# Altium PCB ESC.PcbDoc
Units mm, origin at the board's own origin, x right, y up, seen from the top; angles counter-clockwise.
Board outline 39.75 x 27.3 mm, 4 copper layers (Top Layer, Internal Plane 1, Internal Plane 2, Bottom Layer), stack 1.596 mm thick; 84 components, 56 nets, 277 pads, 49 vias.
Unrouted connection lines stored in the file: 121.
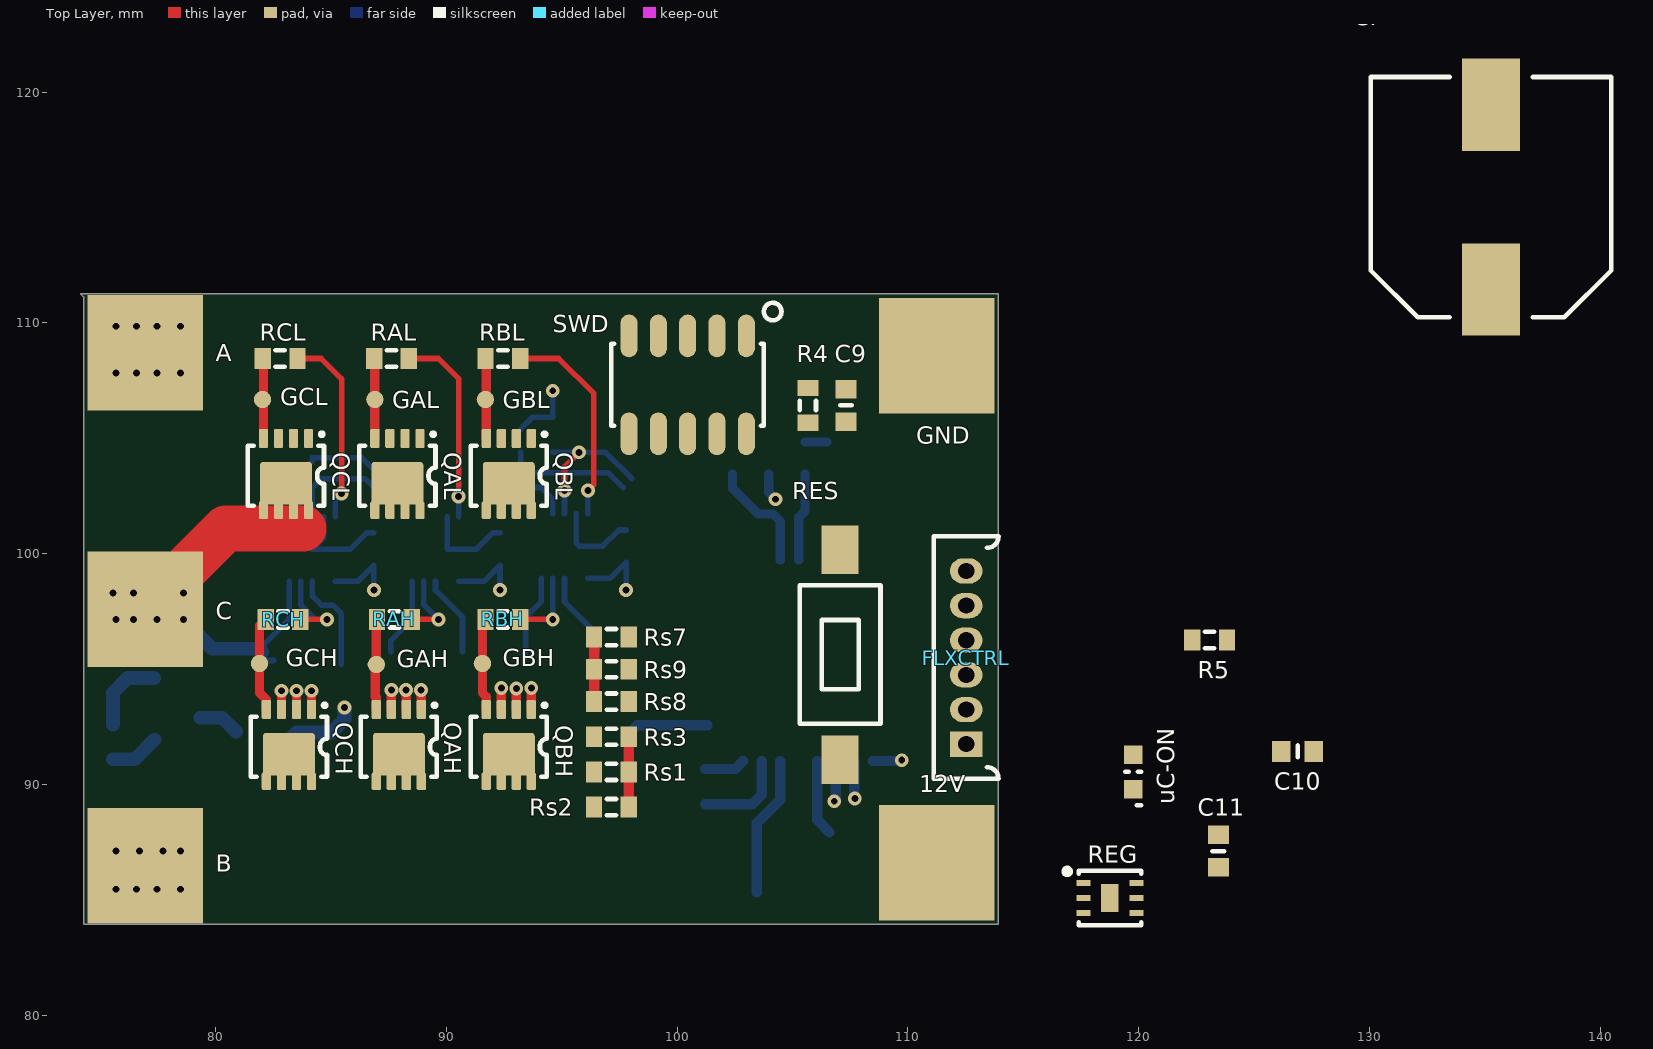
[diagram p0: Top Layer view]
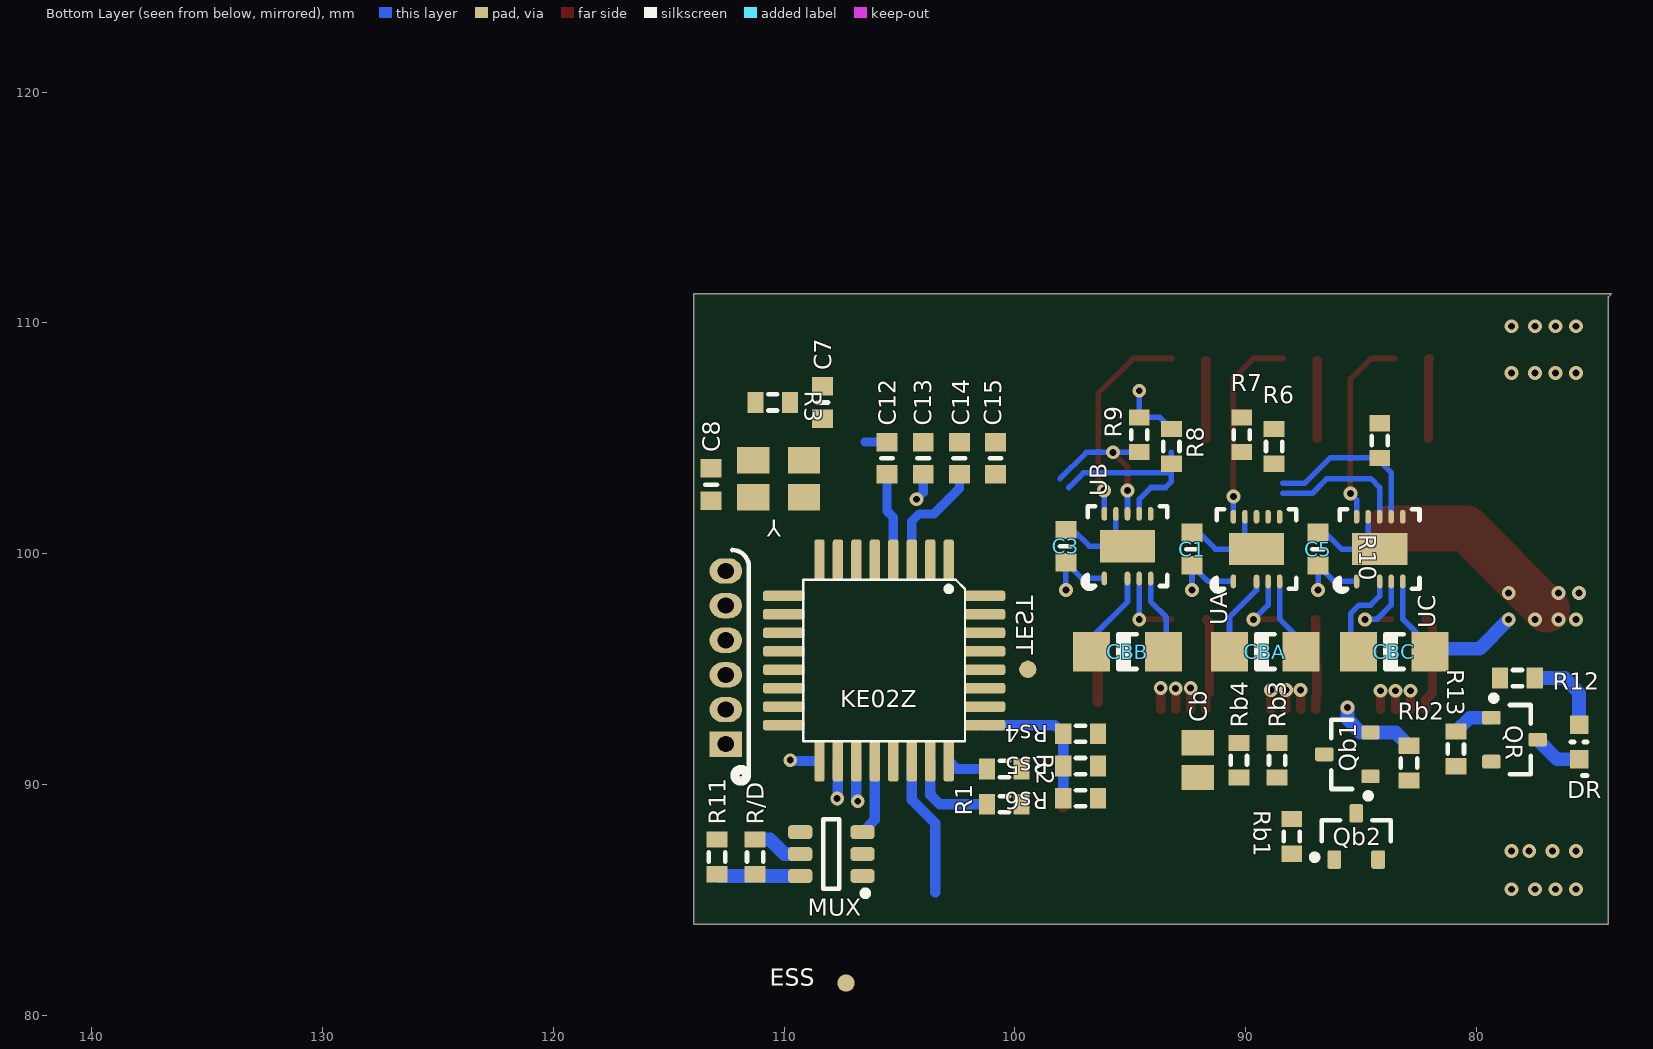
[diagram p1: Bottom Layer view, seen from below]
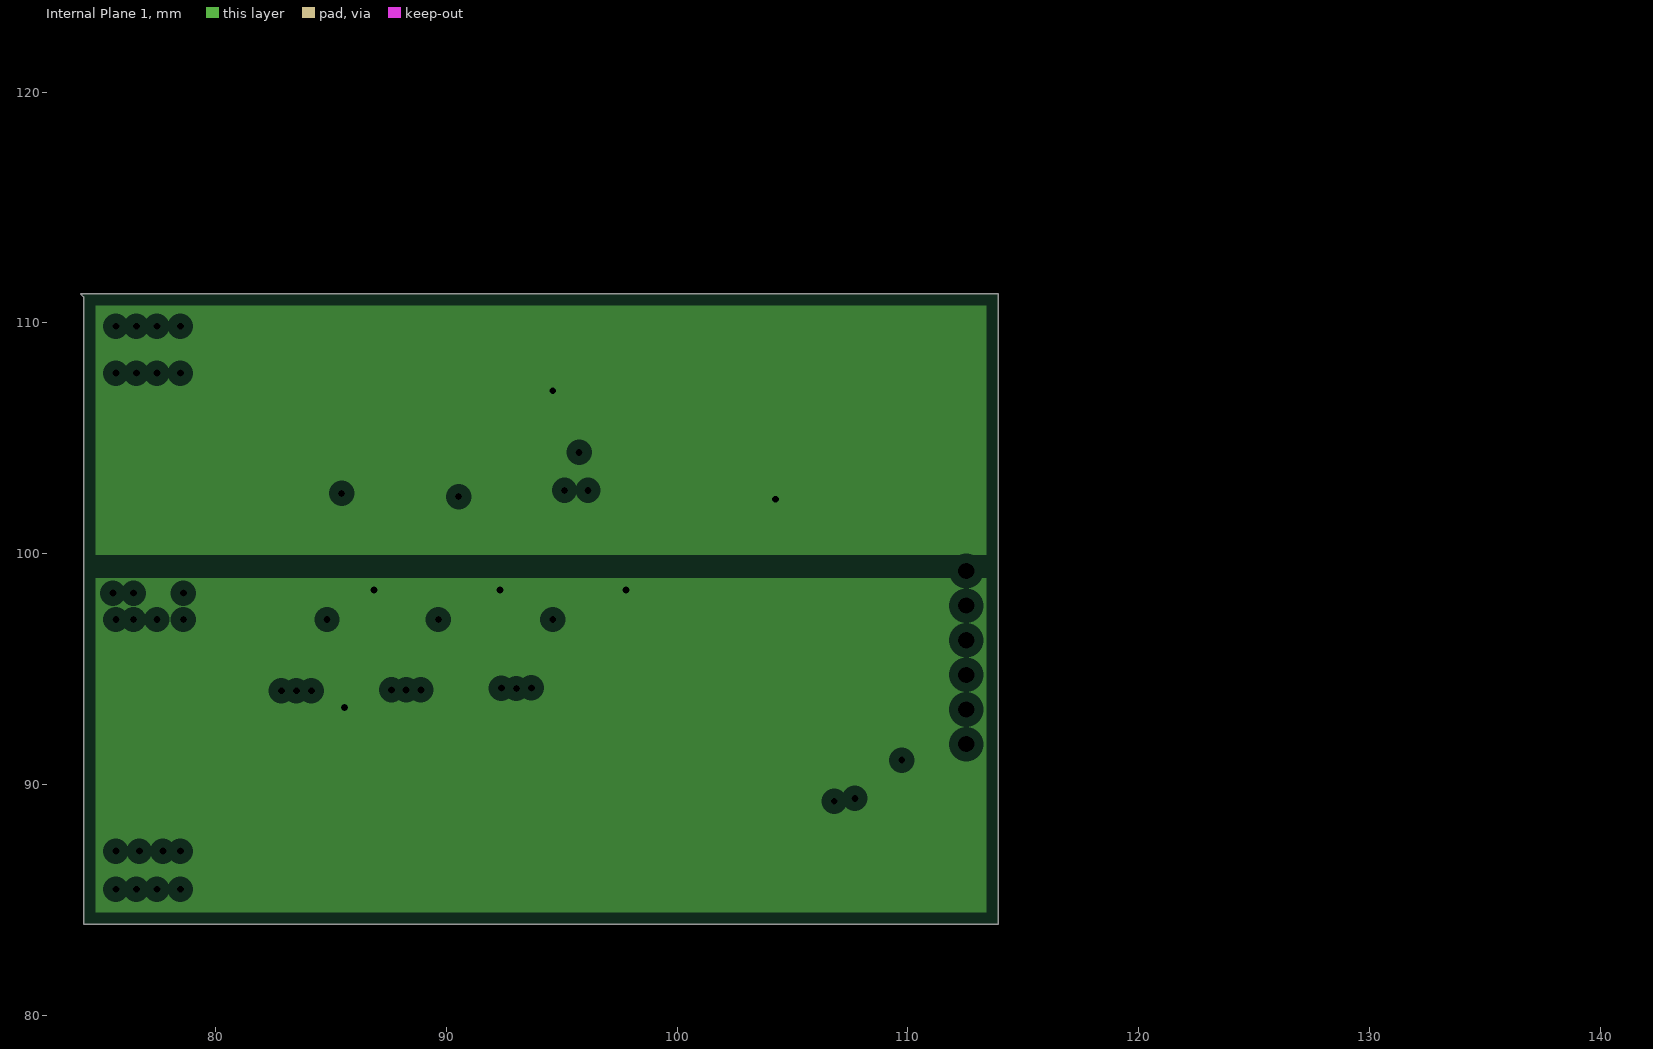
[diagram p2: Internal Plane 1, clearances drawn from the general rule]
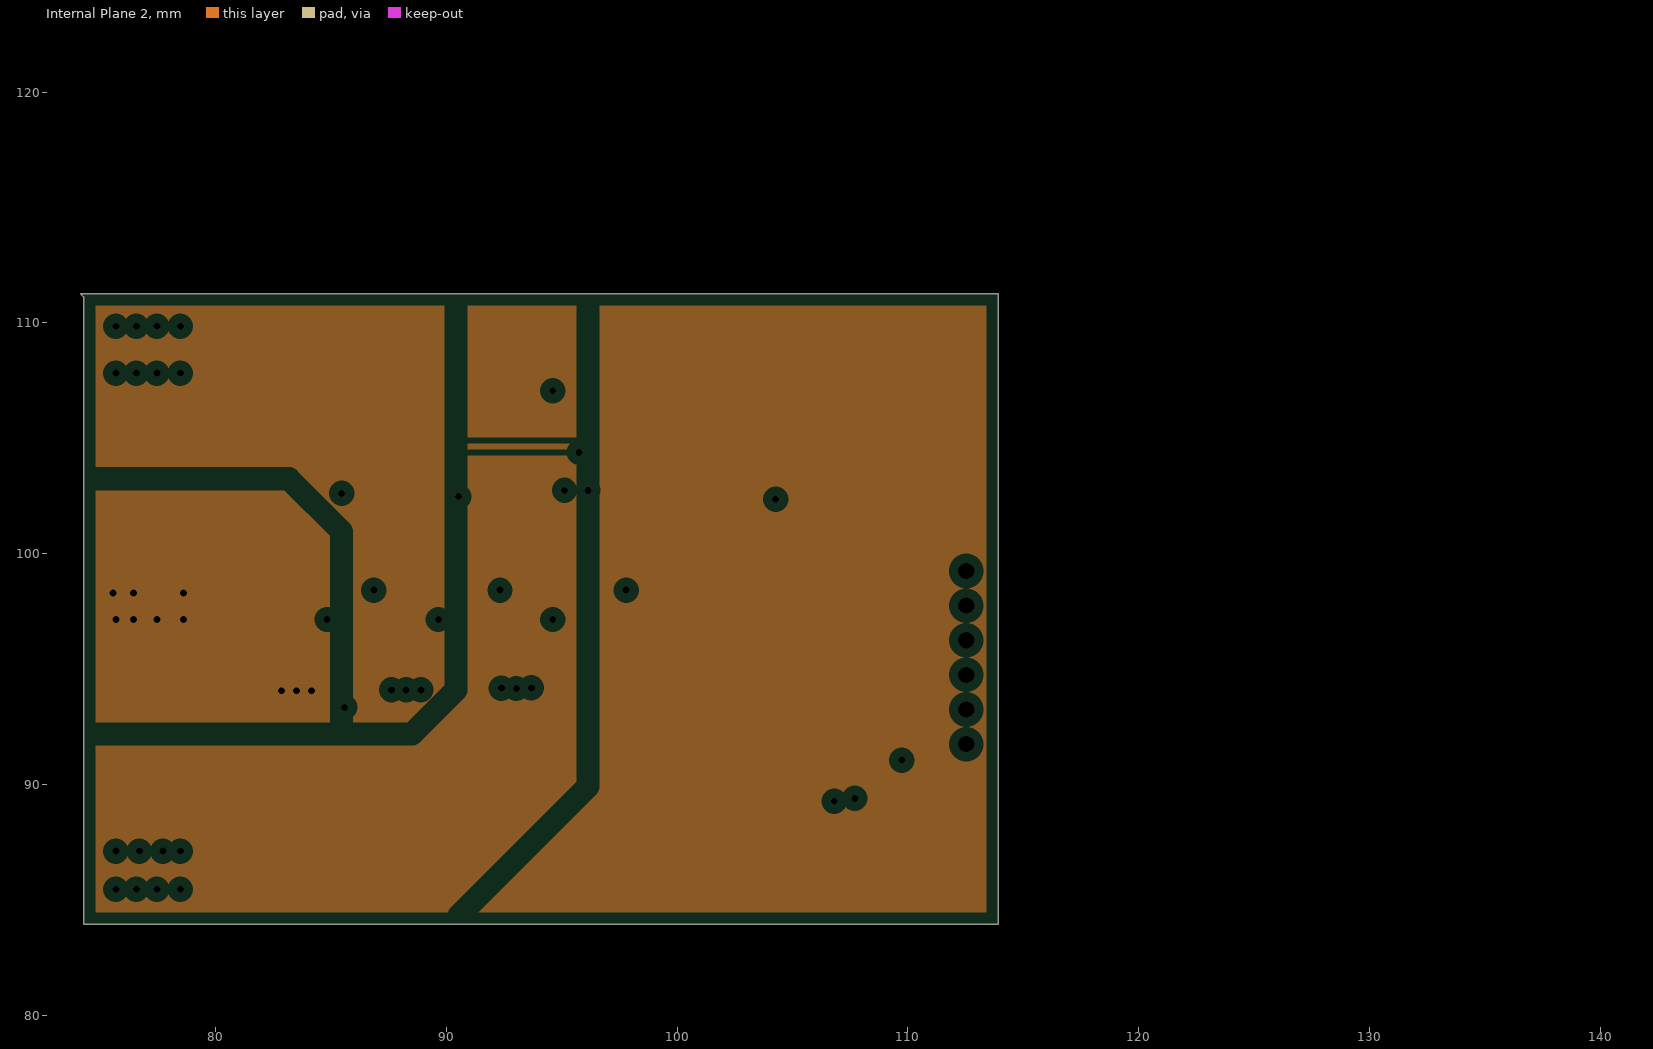
[diagram p3: Internal Plane 2, clearances drawn from the general rule]

## Layer stack, top to bottom
Top Layer: signal copper 0.0356
Dielectric: prepreg 0.127, FR-4, Dk 4.8
Internal Plane 1: plane copper 0.0356, net (Multiple Nets)
Dielectric: core 1.2, FR-4, Dk 4.8
Internal Plane 2: plane copper 0.0356, net (Multiple Nets)
Dielectric: prepreg 0.127, FR-4, Dk 4.8
Bottom Layer: signal copper 0.0356

## Board outline
74.168,111.252 74.295,111.125 74.295,83.947 113.919,83.947 113.919,111.252

## Design rules (kind name [scope] priority, off if disabled: settings)
AcuteAngle AcuteAngle_small [IsWire and (Width  <= 0.2)] p1: minimum=9.00000000000000E+0001 checktracksonly=FALSE
AcuteAngle [not (IsWire and (Width  <= 0.2))] p2: minimum=6.00000000000000E+0001 checktracksonly=FALSE
AssemblyTestPointUsage [All] p1: allowmultiple=TRUE
Clearance Clearance_Poly [All vs inpolygon] p1: gap=0.3
Clearance [All] p2: gap=0.2
ComponentClearance [All] p1: gap=0.25 collisioncheckmode=3 verticalgap=1 showdistances=FALSE
ComponentOrientations [All] p1: allowedrotations=32
FabricationTestPointUsage [All] p1: valid=0 allowmultiple=TRUE
Height [All] p1: minheight=0 maxheight=20 prefheight=10
HoleSize [Not (IsPad and not PadIsPlated)] p1: absolutevalues=TRUE maxlimit=5 minlimit=0.2 maxpercent=80.000 minpercent=20.000
HoleToHoleClearance [All] p1: gap=0.2 allowstackedmicrovias=TRUE
MinimumAnnularRing [All] p1: minimumring=0.1
MinimumSolderMaskSliver [All] p1: minsoldermaskwidth=0.075
NetsToIgnore [InNet('GND')] p1:
PermittedLayers [All] p1: toplayerpermitted=TRUE bottomlayerpermitted=TRUE
PlaneClearance [All] p1: clearance=0.4
PlaneConnect PlaneConnect_Direct [isvia and not TouchesRoom('Via_on_pad1')] p1: planeconnectstyle=Direct reliefexpansion=0.508 reliefentries=4 reliefconductorwidth=0.254 reliefairgap=0.254
PlaneConnect [All] p2: planeconnectstyle=Relief reliefexpansion=0.25 reliefentries=4 reliefconductorwidth=0.25 reliefairgap=0.25
PolygonConnect PolygonConnect_Direct [isvia vs ispolygon] p1: connectstyle=Direct reliefconductorwidth=0.254 reliefentries=4 polygonreliefangle="90 Angle" airgapwidth=0.254
PolygonConnect [All] p2: connectstyle=Relief reliefconductorwidth=0.25 reliefentries=4 polygonreliefangle="90 Angle" airgapwidth=0.254
RoutingCorners [All] p1: cornerstyle=45-Degree minsetback=2.5 maxsetback=2.5
RoutingPriority [All] p1: routingpriority=5
RoutingPriority RoutingPriority_GND [InNet('GND')] p2: routingpriority=10
RoutingVias [All] p1: holewidth=0.3 width=0.6 viastyle="Through Hole" minholewidth=0.2 minwidth=0.4 maxholewidth=6 maxwidth=3
SMDNeckDown SMDNeckDown_tiny2 [ispad or Width <= 0.2] p1: percent=100.000
SMDNeckDown [All] p2: percent=50.000
SMDToCorner SMDToCorner_Exception [HasPad('U1-52') or HasPad('C9-1')] p1: distance=0
SMDToCorner [not (HasPad('U1-52') or HasPad('C9-1'))] p2: distance=59055
ShortCircuit ShortCircuit_NC [HasPad('U5-3') vs not IsElectrical] p1: allowed=TRUE
ShortCircuit [All] p2: allowed=FALSE
SilkToSilkClearance SilkToSilkOverlap [IsText and (StringText = 'Flying') vs IsText and (StringText = 'Automatons')] p1: silktosilkclearance=0
SilkToSilkClearance [All] p2: silktosilkclearance=0.05
SilkToSolderMaskClearance SilkscreenOverComponentPads [IsPad] p1: minsilkscreentomaskgap=0.1 clearancetoexposedcopper=TRUE
SolderMaskExpansion "Via Tenting" [IsVia] p1: expansion=-5
SolderMaskExpansion [All] p2: expansion=0.1
Width [All] p1: maxlimit=3 minlimit=0.2 preferedwidth=0.4
14 further rules are at their usual default settings.

## Classes and differential pairs
component class inverter: C1 C3 C5 CBA CBB CBC CI GAH GAL GBH GBL GCH GCL QAH QAL QBH QBL QCH QCL RAH RAL RBH RBL RCH RCL UA UB UC
component class connectors: 12V A B C ESS FLXCTRL GND SWD
component class microcontroller: C7 C8 C9 C10 C11 C12 C13 C14 C15 DR KE02Z QR R1 R2 R3 R4 R5 R6 R7 R8 R9 R10 R11 R12 R13 R/D REG RES TEST uC-ON Y
component class phase_sense: Cb MUX Qb1 Qb2 Rb1 Rb2 Rb3 Rb4 Rs1 Rs2 Rs3 Rs4 Rs5 Rs6 Rs7 Rs8 Rs9

## Components (designator, comment, footprint, x,y, rotation, side; value= is the part's Value field where it differs from the comment)
12V "5mm" SQUARE_PAD_5mm 111.252,86.614 r0 top
A "5mm" SQUARE_PAD_5mm 76.962,108.712 r90 top
B "5mm" SQUARE_PAD_5mm 76.962,86.487 r90 top
C "5mm" SQUARE_PAD_5mm 76.962,97.599 r90 top
C1 "1uF" CAPC1608L 92.329,100.203 r90 bottom
C3 "1uF" CAPC1608L 97.79,100.33 r90 bottom
C5 "1uF" CAPC1608L 86.868,100.203 r90 bottom
C7 "22pF" CAPC1608L 108.331,106.553 r270 bottom
C8 "22pF" CAPC1608L 113.157,102.997 r90 bottom
C9 "1uF" CAPC1608L 107.315,106.426 r270 top
C10 "1uF" CAPC1608L 126.873,91.44 r180 top
C11 "1uF" CAPC1608L 123.444,87.122 r270 top
C12 "1uF" CAPC1608L 105.537,104.14 r90 bottom
C13 "100nF" CAPC1608L 103.971,104.14 r270 bottom
C14 "1uF" CAPC1608L 102.404,104.14 r90 bottom
C15 "100nF" CAPC1608L 100.838,104.14 r270 bottom
Cb "330pF" CAPC2012L 92.075,91.059 r270 bottom
CBA "10uF" CAPC3216L 89.154,95.758 r180 bottom
CBB "10uF" CAPC3216L 95.123,95.758 r180 bottom
CBC "10uF" CAPC3216L 83.566,95.758 r180 bottom
CI "470uF" CAP_RADIAL-CAN_SMD_M10 135.255,115.443 r90 top
DR "LED-RED" DSO-F2/D3.4 75.565,91.848 r270 bottom
ESS "TESTPOINT-ARROW-BLUE" TESTP_PAD_.75mm#1 107.315,81.407 r270 bottom
FLXCTRL "HEADER-6x1" X-JST-S6B-ZR 112.522,95.504 r90 top
GAH "TESTPOINT-ARROW-BLUE" TESTP_PAD_.75mm#1 86.972,95.204 r90 top
GAL "TESTPOINT-ARROW-BLUE" TESTP_PAD_.75mm#1 86.909,106.68 r90 top
GBH "TESTPOINT-ARROW-BLUE" TESTP_PAD_.75mm#1 91.567,95.25 r90 top
GBL "TESTPOINT-ARROW-BLUE" TESTP_PAD_.75mm#1 91.694,106.68 r90 top
GCH "TESTPOINT-ARROW-BLUE" TESTP_PAD_.75mm#1 81.915,95.25 r90 top
GCL "TESTPOINT-ARROW-BLUE" TESTP_PAD_.75mm#1 82.042,106.68 r90 top
GND "5mm" SQUARE_PAD_5mm 111.252,108.585 r0 top
KE02Z "MKE02ZxxVLC2(R)" JEDEC_MS-026BBA 105.664,95.377 r0 bottom
MUX "TS5A3159A" JEDEC_MO-178AB 107.95,86.995 r0 bottom
QAH "ManufacturerPartNumber" x-NXP_LFPAK33 87.947,91.638 r270 top
QAL "ManufacturerPartNumber" x-NXP_LFPAK33 87.884,103.378 r270 top
Qb1 "BSS84" SOT23-3L 85.598,91.313 r0 bottom
Qb2 "BJT-NPN-BEC" SOT23-3L 85.217,87.757 r90 bottom
QBH "ManufacturerPartNumber" x-NXP_LFPAK33 92.71,91.638 r270 top
QBL "ManufacturerPartNumber" x-NXP_LFPAK33 92.71,103.378 r270 top
QCH "ManufacturerPartNumber" x-NXP_LFPAK33 83.185,91.638 r270 top
QCL "ManufacturerPartNumber" x-NXP_LFPAK33 83.058,103.378 r270 top
QR "BJT-NPN-BEC" SOT23-3L 78.359,91.948 r180 bottom
R1 "10K" RESC1608L 100.457,89.154 r0 bottom
R2 "10K" RESC1608L 100.457,90.678 r0 bottom
R3 "1M" RESC1608L 110.49,106.553 r180 bottom
R4 "10K" RESC1608L 105.664,106.426 r90 top
R5 "100" RESC1608L 123.063,96.266 r0 top
R6 "10K" RESC1608L 88.773,104.648 r90 bottom
R7 "10K" RESC1608L 90.17,105.156 r90 bottom
R8 "10K" RESC1608L 93.218,104.648 r90 bottom
R9 "10K" RESC1608L 94.615,105.156 r90 bottom
R10 "10K" RESC1608L 84.201,104.902 r90 bottom
R11 "10K" RESC1608L 112.903,86.868 r90 bottom
R12 "220" RESC1608L 78.232,94.615 r180 bottom
R13 "10K" RESC1608L 80.899,91.548 r270 bottom
R/D "0" RESC1608L 111.252,86.868 r270 bottom
RAH "6.8" RESC1608L 87.757,97.155 r0 top
RAL "6.8" RESC1608L 87.63,108.458 r0 top
Rb1 "10K" RESC1608L 88.011,87.757 r90 bottom
Rb2 "1M" RESC1608L 82.931,90.932 r270 bottom
Rb3 "2.2K" RESC1608L 88.646,91.059 r90 bottom
Rb4 "680" RESC1608L 90.297,91.059 r270 bottom
RBH "6.8" RESC1608L 92.456,97.155 r0 top
RBL "6.8" RESC1608L 92.456,108.458 r0 top
RCH "6.8" RESC1608L 82.931,97.155 r0 top
RCL "6.8" RESC1608L 82.804,108.458 r0 top
REG "LP5900" x-TI_S-NGF0006A 118.745,85.09 r0 top
RES "SWITCH_TACTILE_SPST-2T-NO" X-TECO_FSMSM 107.061,95.631 r270 top
Rs1 "43K" RESC1608L 97.155,90.551 r0 top
Rs2 "43K" RESC1608L 97.155,89.027 r180 top
Rs3 "10K" RESC1608L 97.155,92.075 r180 top
Rs4 "43K" RESC1608L 97.155,92.202 r0 bottom
Rs5 "43K" RESC1608L 97.155,90.805 r180 bottom
Rs6 "10K" RESC1608L 97.155,89.408 r180 bottom
Rs7 "43K" RESC1608L 97.155,96.393 r180 top
Rs8 "43K" RESC1608L 97.155,93.599 r0 top
Rs9 "10K" RESC1608L 97.155,94.996 r0 top
SWD "HEADER-5x2S" G-HEADER_5x2I.05P_SM 100.457,107.315 r270 top
TEST "TESTPOINT-ARROW-BLUE" TESTP_PAD_.75mm#2 99.441,94.996 r90 top
UA "UCC27201A" x-TI_S-PVSON-N9 89.535,100.203 r90 bottom
UB "UCC27201A" x-TI_S-PVSON-N9 95.123,100.33 r90 bottom
UC "UCC27201A" x-TI_S-PVSON-N9 84.201,100.203 r90 bottom
uC-ON "LED-GREEN" DSO-F2/D3.4 119.761,90.551 r270 top
Y "20MHz" X-EPSO_TSX-3225 110.236,103.251 r270 bottom

## Footprints (in the part's own frame and the unit in brackets; to place one, negate y for a bottom-side part, rotate by r counter-clockwise, add the part's x,y. Pads: shape width x height; smd on the part's side, far side on the other; paste and mask are expansions set on the pad)
CAP_RADIAL-CAN_SMD_M10 [mm]
  rect 4x2.5 smd: 1(-4,0) 2(4,0)
  silkscreen extent -5.21,-5.21 5.21,5.21, body extent -5.21,-5.21 5.21,5.21, height 11
CAPC1608L [mm] "Chip Capacitor, Body 1.6x0.8mm, IPC High Density"
  rect 0.8x0.9 smd: 1(-0.7,0) 2(0.7,0)
  silkscreen extent 0,-0.25 0,0.25, body extent -0.87,-0.48 0.87,0.48, height 0.85
CAPC2012L [mm] "Chip Capacitor, Body 2.0x1.3mm, IPC High Density"
  rect 1.1x1.4 smd: 1(-0.75,0) 2(0.75,0)
  body extent -1.1,-0.72 1.1,0.72, height 1.1
CAPC3216L [mm] "Chip Capacitor, Body 3.2x1.6mm, IPC High Density"
  rect 1.6x1.7 smd: 1(-1.551,0) 2(1.551,0)
  silkscreen extent -0.4,-0.75 0.4,0.75, body extent -1.7,-0.9 1.7,0.9, height 1.35
DSO-F2/D3.4 [mm] "SM LED; 2 Flat Leads"
  rect 0.8x0.8 smd: 1(-0.75,0) 2(0.75,0)
  silkscreen extent 0,-0.35 1.45,0.35, body extent -0.81,-0.39 0.81,0.4, height 0.71
G-HEADER_5x2I.05P_SM [mm] "Header; 5x2 .05'' Pitch, SMD"
  oval 1.85x0.74 smd: 1(-2.121,2.54) 2(2.121,2.54) 3(-2.121,1.27) 4(2.121,1.27) 5(-2.121,0) 6(2.121,0) 7(-2.121,-1.27) 8(2.121,-1.27) 9(-2.121,-2.54) 10(2.121,-2.54)
  silkscreen extent -3.56,-3.3 1.78,4.06, body extent -2.71,-3.18 2.79,3.17, height 4.48
JEDEC_MO-178AB [mm]
  rrect50% 1.05x0.6 smd: 1(-1.35,0.95) 2(-1.35,0) 3(-1.35,-0.95) 4(1.35,-0.95) 5(1.35,0) 6(1.35,0.95)
  silkscreen extent -1.6,-1.5 0.35,1.82, body extent -1.45,-1.47 1.39,1.45, height 1.1
JEDEC_MS-026BBA [mm]
  rrect50% 0.45x1.8 smd: 1(-2.8,-4.35) 2(-2,-4.35) 3(-1.2,-4.35) 4(-0.4,-4.35) 5(0.4,-4.35) 6(1.2,-4.35) 7(2,-4.35) 8(2.8,-4.35) 17(2.8,4.35) 18(2,4.35) 19(1.2,4.35) 20(0.4,4.35) 21(-0.4,4.35) 22(-1.2,4.35) 23(-2,4.35) 24(-2.8,4.35)
  rrect50% 1.8x0.45 smd: 9(4.35,-2.8) 10(4.35,-2) 11(4.35,-1.2) 12(4.35,-0.4) 13(4.35,0.4) 14(4.35,1.2) 15(4.35,2) 16(4.35,2.8) 25(-4.35,2.8) 26(-4.35,2) 27(-4.35,1.2) 28(-4.35,0.4) 29(-4.35,-0.4) 30(-4.35,-1.2) 31(-4.35,-2) 32(-4.35,-2.8)
  silkscreen extent -3.5,-3.5 3.5,3.5, body extent -4.6,-4.6 4.6,4.6, height 1.46
RESC1608L [mm] "Chip Resistor, Body 1.6x0.8mm, IPC High Density"
  rect 0.7x0.9 smd: 1(-0.75,0) 2(0.75,0)
  silkscreen extent -0.2,-0.35 0.2,0.35, body extent -0.85,-0.48 0.85,0.48, height 0.6
SOT23-3L [mm] "SOT23, 3-Leads, Body 2.9x1.3mm, Pitch 0.95mm, Lead Span 2.5mm, IPC High Density"
  rrect30% 0.8x0.6 smd: 1(-1,0.95) 2(-1,-0.95) 3(1,0)
  silkscreen extent -1.02,-1.5 0.7,1.92, body extent -0.7,-1.5 0.7,1.5, height 1.1
SQUARE_PAD_5mm [mm]
  rect 5x5 smd: 1(0,0)
TESTP_PAD_.75mm#1 [mm]
  round 0.75 smd: 1(0,0)
TESTP_PAD_.75mm#2 [mm]
  round 0.75 smd far side: 1(0,0)
X-EPSO_TSX-3225 [mm] "Miniature crystal unit"
  rect 1.15x1.4 smd: 1(-0.8,1.1) 2(-0.8,-1.1) 3(0.8,-1.1) 4(0.8,1.1)
  body extent -1.25,-1.6 1.25,1.6, height 0.6
X-JST-S6B-ZR [mm] "Header, 6 pos, 1.5mm pitch, Side Entry, TH"
  rect 1.1x1.4 hole 0.7: 1(-3.75,0)
  oval 1.1x1.4 hole 0.7: 2(-2.25,0) 3(-0.75,0) 4(0.75,0) 5(2.25,0) 6(3.75,0)
  silkscreen extent -5.25,-1.4 5.25,1.4, body extent -5.25,-4.6 5.25,1.4, height 3.7
x-NXP_LFPAK33 [mm] "Plastic single ended surface mounted package (LFPAK33); 5 Terminals"
  rrect30% 0.83x0.4 smd paste-2 mask+0.05: 1(-1.615,0.975) 2(-1.615,0.325) 3(-1.615,-0.325) 4(-1.615,-0.975)
  rrect14% 1.85x2.25 smd paste-2 mask+0.05: 5(0.325,0)
  rrect30% 0.75x0.4 smd paste-2 mask+0.05: 5(1.495,0.975) 5(1.495,-0.325) 5(1.495,0.325) 5(1.495,-0.975)
  silkscreen extent -1.87,-1.65 1.3,1.65, body extent -1.3,-1.65 1.3,1.65, height 0.9
X-TECO_FSMSM [mm]
  rect 2.1x1.6 smd: 1(-4.55,0) 2(4.55,0)
  silkscreen extent -3,-1.75 3,1.75, body extent -4.98,-1.78 4.98,1.72, height 4.4
x-TI_S-NGF0006A [mm] "6-WSON (2.2x2.5)"
  rect 0.6x0.25 smd: 1(-1.15,0.65) 2(-1.15,0) 3(-1.15,-0.65) 4(1.15,-0.65) 5(1.15,0) 6(1.15,0.65)
  rect 0.75x1.2 smd: 3(0,0)
  silkscreen extent -1.9,-1.19 1.35,1.2, body extent -1.25,-1.1 1.25,1.1, height 0.8
x-TI_S-PVSON-N9 [mm] "9-SON (3x3)"
  oval 0.6x0.24 smd mask+0.07: 1(-1.4,1) 2(-1.4,0) 3(-1.4,-0.5) 4(-1.4,-1) 5(1.4,-1) 6(1.4,-0.5) 7(1.4,0) 8(1.4,0.5) 9(1.4,1)
  rect 1.4x2.4 smd paste-1 mask+0.07: 8(0,0)
  silkscreen extent -1.84,-1.73 1.73,1.94, body extent -1.5,-1.5 1.5,1.5, height 0.9

## Part data
12V A B C GND: library part SOLDER_WIRE_5x5, "Pad to solder wire"
C1 C3 C5 C9 C10 C11 C12 C14: library part CAP_1u_0603_25V_X5R_10%, "CAP CER 1UF 25V 10% X5R 0603"
C7 C8: library part CAP_22p_0603_50V_NP0_5%, "CAP CER 22PF 50V 5% NP0 0603"
C13 C15: library part CAP_100n_0603_50V_Y5V, "CAP CER 0.1UF 50V Y5V 0603"
Cb: library part CAP_330p_0805_100V_NP0_10%, "CAP CER 330PF 100V 5% NP0 0805"
CBA CBB CBC: library part CAP_10u_1206_25V_Y5V, "CAP CER 10UF 25V Y5V 1206"
CI: library part CAP_E_470u_Dia10_25V_Al_20%, "CAP ALUM 470UF 25V 20% SMD"
DR: library part LED_RED_0603_628, "LED POINTLED 628NM SUPER RED SMD"
ESS GAH GAL GBH GBL GCH GCL TEST: library part TESTP_PAD_.75mm, "Round Test Point on Board"
FLXCTRL: library part HEADER_6x1_1.5mm_ZH_TH, "CONN HEADER ZH SIDE 6POS 1.5MM"
KE02Z: library part MKE02Z64VLC2(R), "Kinetis KE02 Cortex®-M0+ MCU 32 Pin LQFP"
MUX: library part x-TI_TS5A3159A, "IC SWITCH SPDT SOT23-6"
QAH QAL QBH QBL QCH QCL: library part PSMN9R0-25MLC, "TRANSISTOR MOSFET N-CHANN 25V 8.6MOHM"
Qb1: "MOSFET P-CH 50V 130MA SOT-23"
Qb2 QR: library part MMBT3904, "TRANSISTOR NPN 40V 0.2A SOT23"
R1 R2 R4 R6 R7 R8 R9 R10 R11 R13 Rb1 Rs1 Rs2 Rs3 Rs4 Rs5 Rs6 Rs7 Rs8 Rs9: library part RES_10K_0603_0W1_1%, "RES 10K OHM 1/10W 5% 0603"
R3 Rb2: library part RES_1M_0603_0W1_1%, "RES 1.00M OHM 1/10W 1% 0603 SMD"
R5 R12: library part RES_100_0603_0W1_1%, "RES 100 OHM 1/10W 5% 0603 SMD"
R/D: library part RES_0_0603_0W1_1%, "RES 0.0 OHM 1/10W JUMP 0603"
RAH RAL RBH RBL RCH RCL: library part RES_6R8_0603_0W1_1%, "RES 6.8 OHM 1/10W 1% 0603"
Rb3: library part RES_2K2_0603_0W1_1%, "RES 2.2K OHM 1/10W 1% 0603 SMD"
Rb4: library part RES_680_0603_0W1_1%, "RES 680 OHM 1/10W 1% 0603 SMD"
REG: library part x-TI_LP5900, "IC REG LDO 3.3V 0.15A 6WSON"
RES: library part SW_TACT_3.5x6mm_SMT, "SWITCH TACTILE SPST-NO 0.05A 12V"
SWD: library part HEADER_5x2_50mil_U, "CONN HEADER 10POS DL UNSHRD SMD"
UA UB UC: library part x-TI_UCC27201A, "IC DVR HIGH/LOW SIDE 3A 9SON"
uC-ON: library part LED_GREEN_0603_530, "LED CHIPLED 570NM GREEN 0603 SMD"
Y: library part XTAL_20M_SMD_9p, "CRYSTAL 20MHZ 9PF SMD"

## Via types
v1: diameter 0.6, hole 0.3, Top Layer to Bottom Layer, 49 vias

## Nets (pads, with @x,y where several pads share a name; then routed paths per layer and width w, separated by ;. In a path a pad name is that pad's centre, name@x,y a point inside that pad or via, vN(x,y) a via of type N, cw(c..) or ccw(c..) an arc to the next point about the centre after c; other vN are vias at no path point)
3.3V: C11.1 C12.1 C13.1 C14.1 C15.1 KE02Z.3 KE02Z.4 MUX.5 R1.1 R2.1 R4.1 R/D.1 REG.1 uC-ON.1 | length 11
  Bottom Layer w0.4: C14.1 102.404,102.828 103.505,101.727 104.14,101.727 104.464,101.403 KE02Z.3 ; KE02Z.4 105.264,101.581 105.537,101.854 C12.1
  Bottom Layer w0.6: MUX.5 109.982,86.995 110.605,87.618 R/D.1
5V: C10.1 FLXCTRL.2 R12.1 REG.4 REG.6
A_C: KE02Z.19 Rs1.2 Rs2.1 Rs3.1 | length 4.6
  Top Layer w0.45: Rs2.1 Rs3.1
  Bottom Layer w0.45: v1@106.864,89.465 KE02Z.19
  other v1: 106.807,89.281
ACMP1_OUT: KE02Z.9 KE02Z.15
B_C: KE02Z.25 Rs4.2 Rs5.1 Rs6.1 | length 6.4
  Bottom Layer w0.45: Rs6.1 Rs5.1 Rs4.2 98.28,92.577 KE02Z.25
BAT_EN: KE02Z.27 Rb1.2
BAT_S: Cb.1 KE02Z.18 Rb3.2 Rb4.1 | length 1.7
  Bottom Layer w0.45: v1@107.664,89.313 KE02Z.18
  other v1: 107.696,89.408
C_C: KE02Z.26 Rs7.2 Rs8.1 Rs9.1 | length 2.8
  Top Layer w0.45: Rs8.1 Rs9.1 Rs7.2
DRVA_H: KE02Z.14 R6.1 UA.6
DRVA_L: KE02Z.13 R7.1 UA.7
DRVB_H: KE02Z.12 R8.1 UB.6 | length 8.3
  Bottom Layer w0.24: 93.218,104.406 93.218,103.505 ; UB.6 94.623,102.354 94.107,102.87 93.472,102.87 93.218,103.124 93.218,103.505 ; 97.663,102.87 97.028,103.505 93.218,103.505
DRVB_L: KE02Z.11 R9.1 UB.7 | length 6.8
  Top Layer w0.24: v1(95.123,102.743) 95.123,103.759 v1(95.758,104.394)
  Bottom Layer w0.24: R9.1 v1@95.746,104.406 ; UB.7 v1@95.123,102.616 ; v1(95.123,102.743) v1@95.25,102.743 ; v1(95.758,104.394) 96.901,104.394 98.044,103.251
DRVC_H: KE02Z.17 R10.1 UC.6 | length 8.5
  Bottom Layer w0.24: UC.6 83.701,103.513 R10.1@84.201,104.013 ; R10.1 86.348,104.152 87.444,103.056 88.392,103.056
  Bottom Layer w0.45: KE02Z.17 v1@109.696,91.027
  other v1: 109.728,91.059
DRVC_L: KE02Z.10 UC.7 | length 5.9
  Bottom Layer w0.24: UC.7 84.201,102.87 84.582,103.251 86.487,103.251 87.122,102.616 88.392,102.616
EXTAL: C8.1 KE02Z.7 R3.2 Y.1
GND: C1.2 C3.2 C5.2 C7.2 C8.2 C9.2 C10.2 C11.2 C12.2 C13.2 C14.2 C15.2 Cb.2 CI.2 FLXCTRL.3 GND.1 KE02Z.5 KE02Z.6 MUX.2 QAL.1 QAL.2 QAL.3 Qb2.2 QBL.1 QBL.2 QBL.3 QCL.1 QCL.2 QCL.3 QR.2 R5.2 R6.2 R7.2 R8.2 R9.2 R10.2 R11.2 Rb4.2 REG.3 RES.2 Rs3.2 Rs6.2 Rs9.2 SWD.3 SWD.5 UA.8 UB.8 UC.8 Y.2 Y.4 | length 17.2
  Bottom Layer w0.24: UC.8@84.701,101.603 84.701,100.703 84.201,100.203 85.852,100.203 86.552,100.903 C5.2 ; UA.8@90.035,101.603 90.035,100.211 90.043,100.203 91.313,100.203 92.013,100.903 C1.2 ; R8.2 93.726,105.906 R9.2 v1(94.615,107.061) ; UB.8@95.623,101.73 95.623,100.465 95.758,100.33 96.774,100.33 97.474,101.03 C3.2
  Bottom Layer w0.4: C13.2 103.971,102.658 v1(104.267,102.362) ; C12.2 106.488,104.84
LEDR: KE02Z.24 R2.2 R13.2 | length 1.8
  Bottom Layer w0.45: R2.2 102.515,90.678 KE02Z.24
LEDY: KE02Z.23 R1.2 | length 4.1
  Bottom Layer w0.45: R1.2 103.239,89.154 103.251,89.142 103.664,89.555 KE02Z.23
MUX_OUT: KE02Z.30 MUX.4
N_C: KE02Z.20 MUX.3 Rs2.2 Rs5.2 Rs8.2 | length 3.3
  Bottom Layer w0.45: KE02Z.20 106.064,88.481 MUX.3
NetCBA_1: CBA.1 UA.2 | length 3.5
  Bottom Layer w0.24: UA.2 89.535,98.425 90.705,97.255 CBA.1
NetCBB_1: CBB.1 UB.2 | length 3.8
  Bottom Layer w0.24: UB.2 95.123,97.917 96.547,96.493 CBB.1@96.547,95.758
NetCBC_1: CBC.1 UC.2 | length 4.4
  Bottom Layer w0.24: UC.2 84.201,98.171 84.597,97.775 85.093,97.775 85.456,97.412 CBC.1@85.456,95.208
NetDR_1: DR.1 R12.2 | length 3.4
  Bottom Layer w0.6: DR.1 75.565,93.98 76.2,94.615 R12.2@77.343,94.615
NetDR_2: DR.2 QR.3 | length 2.1
  Bottom Layer w0.6: DR.2 76.509,91.098 QR.3
NetQb1_1: Qb1.1 Qb2.3 Rb2.2
NetQb1_3: Qb1.3 Rb3.1
NetQb2_1: Qb2.1 Rb1.1
NetQR_1: QR.1 R13.1 | length 1.8
  Bottom Layer w0.6: QR.1 80.299,92.898 R13.1
NetR5_1: R5.1 uC-ON.2
NetRAH_2: RAH.2 UA.3 | length 3.1
  Top Layer w0.24: RAH.2 v1(89.662,97.155)
  Bottom Layer w0.24: UA.3 89.035,97.782 v1(89.662,97.155)
NetRAL_2: RAL.2 UA.9 | length 8.5
  Top Layer w0.24: RAL.2 89.662,108.458 90.535,107.585 v1(90.535,102.473)
  Bottom Layer w0.24: UA.9 v1(90.535,102.473)
NetRBH_2: RBH.2 UB.3 | length 3.2
  Top Layer w0.24: RBH.2 v1(94.615,97.155)
  Bottom Layer w0.24: v1(94.615,97.155) 94.623,97.163 UB.3
NetRBL_2: RBL.2 UB.9 | length 9.1
  Top Layer w0.24: RBL.2 94.869,108.458 96.393,106.934 96.393,102.997 v1(96.139,102.743)
  Bottom Layer w0.24: UB.9 96.123,102.727 v1(96.139,102.743)
NetRCH_2: RCH.2 UC.3 | length 3.6
  Top Layer w0.24: RCH.2 v1(84.836,97.155)
  Bottom Layer w0.24: UC.3 83.701,97.782 84.328,97.155 v1(84.836,97.155)
NetRCL_2: RCL.2 UC.9 | length 8.4
  Top Layer w0.24: RCL.2 84.582,108.458 85.471,107.569 v1(85.471,102.616)
  Bottom Layer w0.24: UC.9 85.201,102.346 v1(85.471,102.616)
PWR_VCC: 12V.1 C1.1 C3.1 C5.1 CI.1 QAH.5 Qb1.2 QBH.5 QCH.5 Rb2.1 UA.1 UB.1 UC.1 | length 13
  Bottom Layer w0.24: UC.1 86.168,98.803 C5.1 v1(86.868,98.425) ; UA.1 91.629,98.803 C1.1 v1(92.329,98.425) ; UB.1 97.09,98.93 C3.1 v1(97.79,98.425)
  Bottom Layer w0.6: Rb2.1 83.512,92.263 Qb1.2 85.024,92.263 85.598,92.837 v1(85.598,93.345)
QA_OUT: A.1 CBA.2 QAH.1 QAH.2 QAH.3 QAL.5 Rs1.1 UA.4 | length 6
  Top Layer w0.4: QAH.3 87.622,94.099 v1(87.63,94.107) ; v1(88.265,94.107) 88.272,94.1 QAH.2 ; v1(88.9,94.107) 88.922,94.085 QAH.1
  Bottom Layer w0.24: CBA.2 87.603,96.239 88.535,97.171 UA.4
  other v1: 75.692,107.823 76.581,107.823 77.47,107.823 78.486,107.823 75.692,109.855 76.581,109.855 77.47,109.855 78.486,109.855
QAH_IN: GAH.1 QAH.4 RAH.1 | length 4
  Top Layer w0.4: QAH.4 86.972,93.775 86.93,93.817 86.93,95.162 GAH.1 86.972,97.12 RAH.1
QAL_IN: GAL.1 QAL.4 RAL.1 | length 3.4
  Top Layer w0.4: QAL.4 RAL.1@86.909,108.372
QB_OUT: B.1 CBB.2 QBH.1 QBH.2 QBH.3 QBL.5 Rs4.1 UB.4 | length 6.5
  Top Layer w0.4: QBH.3 v1(92.385,94.184) ; QBH.2 v1(93.035,94.163) ; QBH.1 v1(93.685,94.193)
  Bottom Layer w0.24: CBB.2@93.445,95.504 93.445,97.255 94.123,97.933 UB.4
  other v1: 75.692,85.471 76.581,85.471 77.47,85.471 78.486,85.471 75.692,87.122 76.708,87.122 77.724,87.122 78.486,87.122
QBH_IN: GBH.1 QBH.4 RBH.1 | length 4
  Top Layer w0.4: RBH.1 91.567,97.016 91.567,93.98 91.735,93.812 QBH.4
QBL_IN: GBL.1 QBL.4 RBL.1 | length 3.4
  Top Layer w0.4: QBL.4 RBL.1@91.735,108.372
QC_OUT: C.1 CBC.2 QCH.1 QCH.2 QCH.3 QCL.5 Rs7.1 UC.4 | length 18.4
  Top Layer w0.4: QCH.3 v1@82.86,94.036 ; QCH.2 v1@83.51,94.051 ; QCH.1 v1(84.16,94.066)
  Top Layer w2: C.1 80.454,101.092 83.82,101.092
  Bottom Layer w0.24: CBC.2@82.042,95.377 CBC.2@82.523,95.377 ; CBC.2@82.042,96.012 83.201,97.171 UC.4
  Bottom Layer w0.6: v1(78.613,97.155) 79.883,95.885 81.888,95.885 CBC.2
  other v1: 82.86,94.066 83.51,94.066 75.692,97.155 76.454,97.155 77.47,97.155 75.565,98.298 76.454,98.298 78.613,98.298
QCH_IN: GCH.1 QCH.4 RCH.1 | length 4.1
  Top Layer w0.4: RCH.1 81.915,96.889 81.915,93.98 82.21,93.685 QCH.4
QCL_IN: GCL.1 QCL.4 RCL.1 | length 3.5
  Top Layer w0.4: RCL.1 82.083,108.429 QCL.4
RESET: C9.1 KE02Z.31 R4.2 RES.1 SWD.10
SPI_CS: ESS.1 FLXCTRL.1 KE02Z.21
SPI_MISO: FLXCTRL.6 KE02Z.22 | length 6.1
  Bottom Layer w0.45: 103.445,85.344 103.445,88.332 104.464,89.351 KE02Z.22
SPI_MOSI: FLXCTRL.5 KE02Z.1
SPI_SCK: FLXCTRL.4 KE02Z.2
SWD_CLK: MUX.1 SWD.4
SWD_DIO: KE02Z.32 SWD.2
TEST: KE02Z.28 TEST.1
XTAL: C7.1 KE02Z.8 R3.1 Y.3
¬RUN/DEBUG: KE02Z.29 MUX.6 R11.1 R/D.2 | length 3.6
  Bottom Layer w0.6: MUX.6 112.83,86.045 R11.1
pads on no net: KE02Z.16 REG.2 REG.5 SWD.1 SWD.6 SWD.7 SWD.8 SWD.9 UA.5 UB.5 UC.5

## Polygon pours and split planes (outlines as drawn)
GND on Internal Plane 1 (split plane): 113.409,99.943 74.805,99.943 74.805,110.742 113.409,110.742
PWR_VCC on Internal Plane 1 (split plane): 113.409,84.457 74.805,84.457 74.805,98.939 113.409,98.939
no net on Internal Plane 2 (split plane): 95.637,104.523 90.926,104.523 90.926,104.773 95.637,104.773
no net on Internal Plane 2 (split plane): 95.637,105.031 90.926,105.031 90.926,110.742 95.637,110.742
no net on Internal Plane 2 (split plane): 113.409,84.457 91.391,84.457 96.494,89.561 96.557,89.637 96.603,89.724 96.632,89.818 96.641,89.916 96.641,110.742 113.409,110.742
QC_OUT on Internal Plane 2 (split plane): 89.922,94.315 88.311,92.704 85.973,92.704 85.973,94.615 85.973,100.965 85.964,101.063 85.935,101.157 85.889,101.244 85.826,101.32 83.54,103.606 83.464,103.669 83.377,103.715 83.283,103.744 83.185,103.753 74.805,103.753 74.805,110.742 89.922,110.742
QC_OUT on Internal Plane 2 (split plane): 84.969,100.757 84.969,94.615 84.969,92.704 74.805,92.704 74.805,102.749 82.977,102.749
no net on Internal Plane 2 (split plane): 95.637,90.124 90.196,84.683 90.133,84.607 90.087,84.52 90.068,84.457 74.805,84.457 74.805,91.7 88.519,91.7 88.617,91.709 88.711,91.738 88.798,91.784 88.874,91.847 90.779,93.752 90.842,93.828 90.888,93.915 90.917,94.009 90.926,94.107 90.926,104.265 95.637,104.265

## Other copper
Internal Plane 1 (plane layer: these items are gaps in the copper):
  lines w1: 74.422,99.441 114.046,99.441
Internal Plane 2 (plane layer: these items are gaps in the copper):
  lines w0.254: 90.424,104.394 96.139,104.394 96.266,104.521 ; 90.424,104.902 96.139,104.902 ; 90.424,110.871 90.551,110.998 96.139,110.998
  lines w1: 74.295,103.251 83.185,103.251 85.471,100.965 85.471,94.615 85.471,92.456 ; 74.676,92.202 88.519,92.202 90.424,94.107 90.424,110.871 ; 90.551,84.328 96.139,89.916 96.139,111.125